# EAGLE board micro2_cooler (EAGLE 9.7.0)

Size 210.66 x 127.21 mm. Coordinates in mm from the lower left corner, seen from the top.
Outline: 0,0 210.66,0 210.66,127.21 0,127.21 0,0
Copper layers (1*16): Top 0.035mm / dielectric 1.5mm / Bottom 0.035mm
Design rules "default": minimum track width 6mil, minimum drill 0.35mm, track to track 6mil, track to pad 6mil, pad to pad 6mil, via to via 6mil, smd to smd 6mil, copper to edge 40mil, drill to drill 6mil, minimum pad ring 10mil, minimum via ring 8mil, stop-mask expansion 4mil, vias tented up to drill 0mil, thermal gap 10mil

## Footprints (pad centres in the part's own frame; a part is rotated, then mirrored left to right if it is on the bottom)
DIODE-AXIAL = drill 1: 1 -5.08,0; 2 5.08,0
MOTOR = drill 1.118 pad 3.15 octagon: + 2.54,0; - -2.54,0
PIEZO = drill 1 pad 1.6: 1 -3.5,0; 2 3.5,0
RESAD1016W63L850D250B = drill 0.83 pad 1.43: 1 -5.08,0; 2 5.08,0
HA-06-SM065 = drill 1 pad 1.676: 1 -2.54,-2.54; 2 0,2.54; 3 2.54,-2.54
SWITCH-MOMENTARY-PTH-6.5MM = drill 1.016 pad 1.88: 1 -3.251,2.261; 2 3.251,2.261; 3 -3.251,-2.261; 4 3.251,-2.261
TO92 = drill 0.813 octagon: 1 -1.27,0; 2 0,1.905; 3 1.27,0
ARDUINO-UNO-R3-SHIELD = drill 1.016 pad 1.88: 3.3V 24.13,-2.54; 5V 24.13,0; A0 24.13,12.7; A1 24.13,15.24; A2 24.13,17.78; A3 24.13,20.32; A4 24.13,22.86; A5 24.13,25.4; AREF -24.13,-13.97; D2 -24.13,20.32; D3 -24.13,17.78; D4 -24.13,15.24; D5 -24.13,12.7; D6 -24.13,10.16; D7 -24.13,7.62; D8 -24.13,3.81; D9 -24.13,1.27; D10 -24.13,-1.27; D11 -24.13,-3.81; D12 -24.13,-6.35; D13 -24.13,-8.89; GND@0 24.13,2.54; GND@1 24.13,5.08; GND@2 -24.13,-11.43; IOREF 24.13,-7.62; NC 24.13,-10.16; RES 24.13,-5.08; RX -24.13,25.4; SCL -24.13,-19.05; SDA -24.13,-16.51; TX -24.13,22.86; VIN 24.13,7.62
JHD-162A = drill 1.016 long: 1 -19.05,0; 2 -16.51,0; 3 -13.97,0; 4 -11.43,0; 5 -8.89,0; 6 -6.35,0; 7 -3.81,0; 8 -1.27,0; 9 1.27,0; 10 3.81,0; 11 6.35,0; 12 8.89,0; 13 11.43,0; 14 13.97,0; 15 16.51,0; 16 19.05,0

## Placement (x,y rotation side)
D1  DIODEDIODE-AXIAL  [DIODE-AXIAL]  161.63,77.14 180 top
M1  MOTOR_HDR  [MOTOR]  177.1,102.29 0 top
PIEZO1  PIEZO  [PIEZO]  88.65,113.63 0 top
R1  220  [RESAD1016W63L850D250B]  151.47,84.76 270 top
R2  1k  [RESAD1016W63L850D250B]  164.17,72.06 0 top
R3  10k  [RESAD1016W63L850D250B]  166.71,51.74 90 top
R4  1k  [RESAD1016W63L850D250B]  161.63,51.74 90 top
RPOT1  250k  [HA-06-SM065]  110.83,56.82 0 top
S1  SWITCH_MOMENTARY  [SWITCH-MOMENTARY-PTH-6.5MM]  203.3,53.85 180 top
S2  SWITCH_MOMENTARY  [SWITCH-MOMENTARY-PTH-6.5MM]  191.32,53.94 180 top
T1  NPN  [TO92]  169.25,79.68 0 top
U1  TMP36GT9Z_TO92  [TO92]  110.83,79.68 0 top
U3  ARDUINO-UNO-R3-SHIELD  [ARDUINO-UNO-R3-SHIELD]  47.88,69.65 270 top
U4  LCD-16X2JHD-162A  [JHD-162A]  132.42,36.63 0 top

## Library data of the parts
D1 M1 PIEZO1 R1-R4 RPOT1 S1 S2 U1 U3 U4 = Tinkercad
T1 = Tinkercad; CATEGORY: Transistor; SUB-CATEGORY: BJT; TYPE: NPN

## Nets
M1_-: D1.1 M1.- T1.1
T1_B: R2.2 T1.2
U3_5V: D1.2 M1.+ R1.1 RPOT1.1 S1.1 S2.1 U1.3 U3.5V U4.2
U3_A0: U1.2 U3.A0
U3_D2: U3.D2 U4.14
U3_D3: U3.D3 U4.13
U3_D4: U3.D4 U4.12
U3_D5: U3.D5 U4.11
U3_D6: R4.2 S2.3 U3.D6
U3_D7: R3.2 S1.3 U3.D7
U3_D8: PIEZO1.1 U3.D8
U3_D9: R2.1 U3.D9
U3_D11: U3.D11 U4.6
U3_D12: U3.D12 U4.4
U3_GND: PIEZO1.2 R3.1 R4.1 RPOT1.3 T1.3 U1.1 U3.GND@0 U3.GND@1 U3.GND@2 U4.1 U4.5 U4.16
U4_LED+: R1.2 U4.15
U4_VO: RPOT1.2 U4.3

## Tracks (layer width: path | path; a pad name or v marks a point on that pad's centre or on a via)
M1_-  (2 unrouted)
T1_B  (1 unrouted)
U3_5V  (8 unrouted)
U3_A0  (1 unrouted)
U3_D2  (1 unrouted)
U3_D3  (1 unrouted)
U3_D4  (1 unrouted)
U3_D5  (1 unrouted)
U3_D6  (2 unrouted)
U3_D7  (2 unrouted)
U3_D8  (1 unrouted)
U3_D9  (1 unrouted)
U3_D11  (1 unrouted)
U3_D12  (1 unrouted)
U3_GND  (11 unrouted)
U4_LED+  (1 unrouted)
U4_VO  (1 unrouted)